# Altium PCB chipshouter-pico.PcbDoc (part 1 of 2)
Units mm, origin at the board's own origin, x right, y up, seen from the top; angles counter-clockwise.
Board outline 40 x 116 mm, 2 copper layers (Top Layer, Bottom Layer); 44 components, 36 nets, 230 pads, 5 vias.
Unrouted connection lines stored in the file: 2.
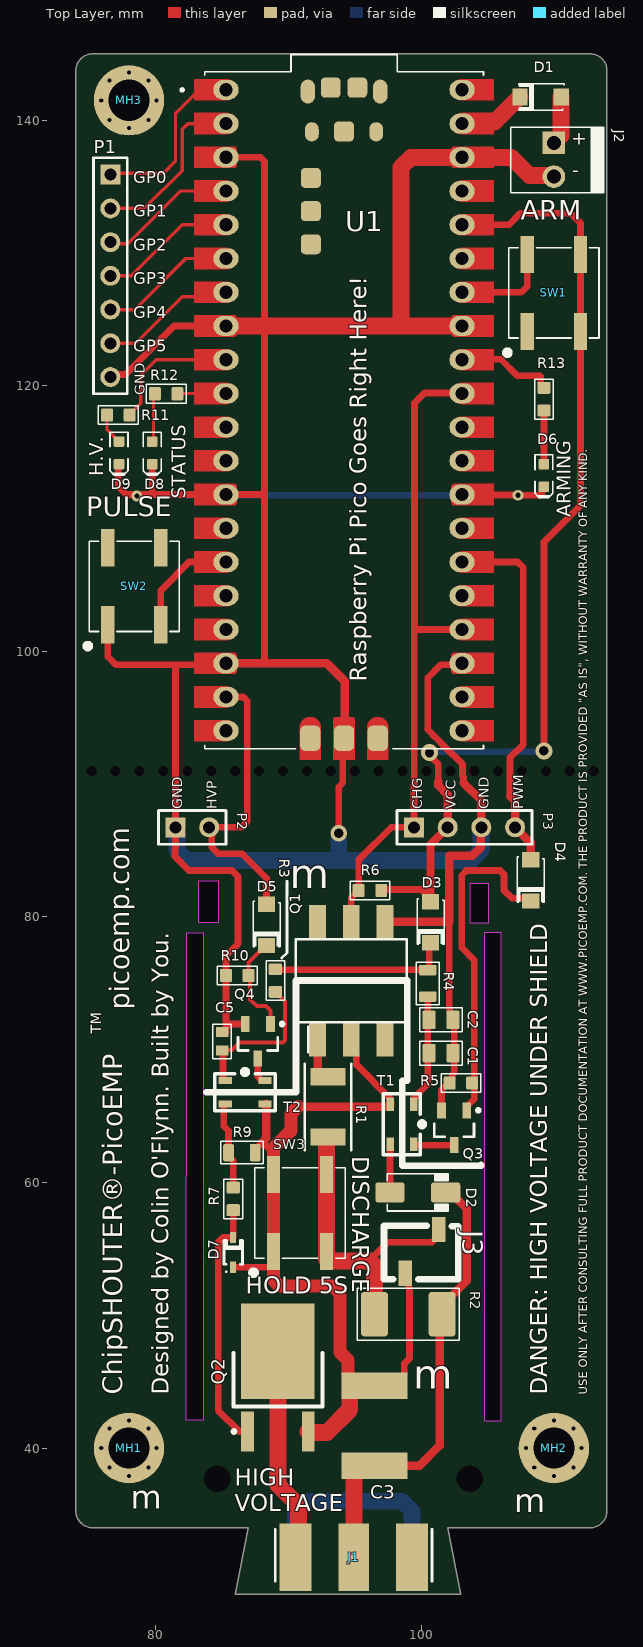
[diagram p0: Top Layer view]
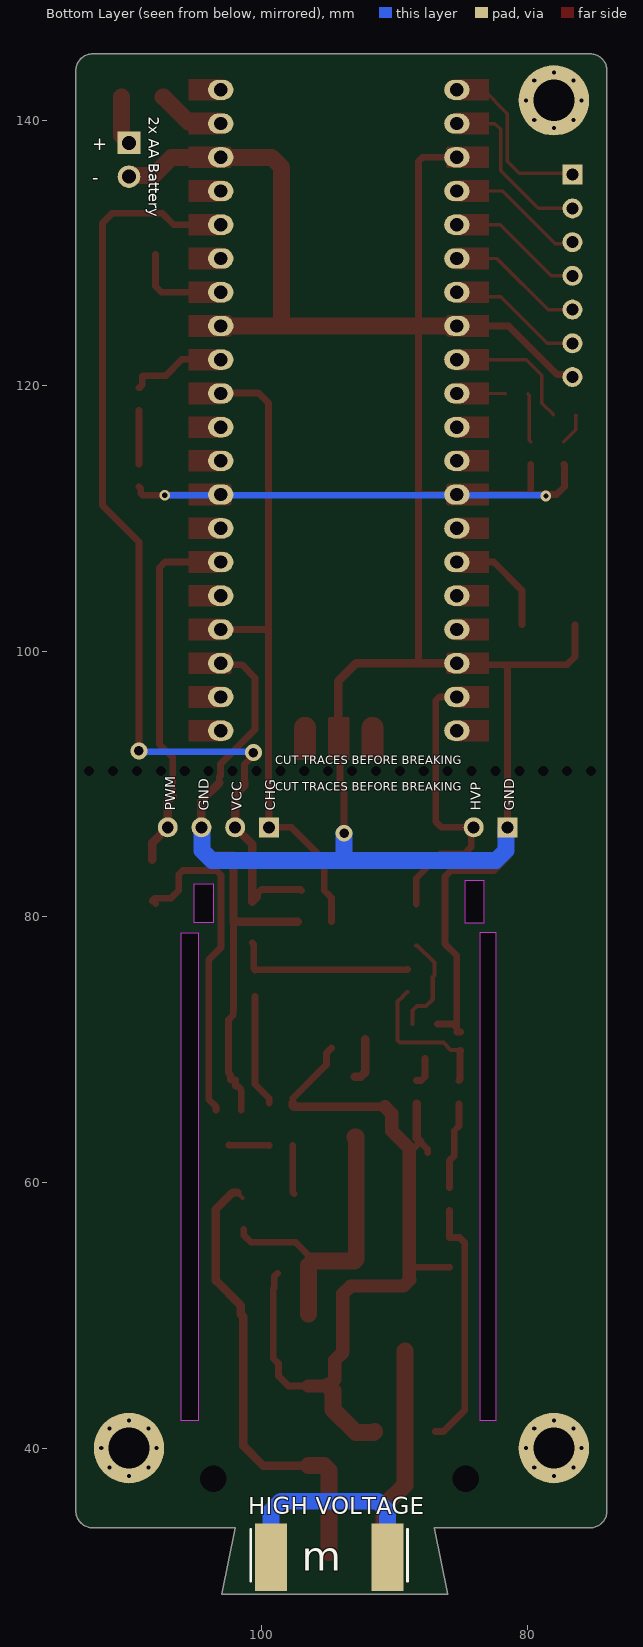
[diagram p1: Bottom Layer view, seen from below]
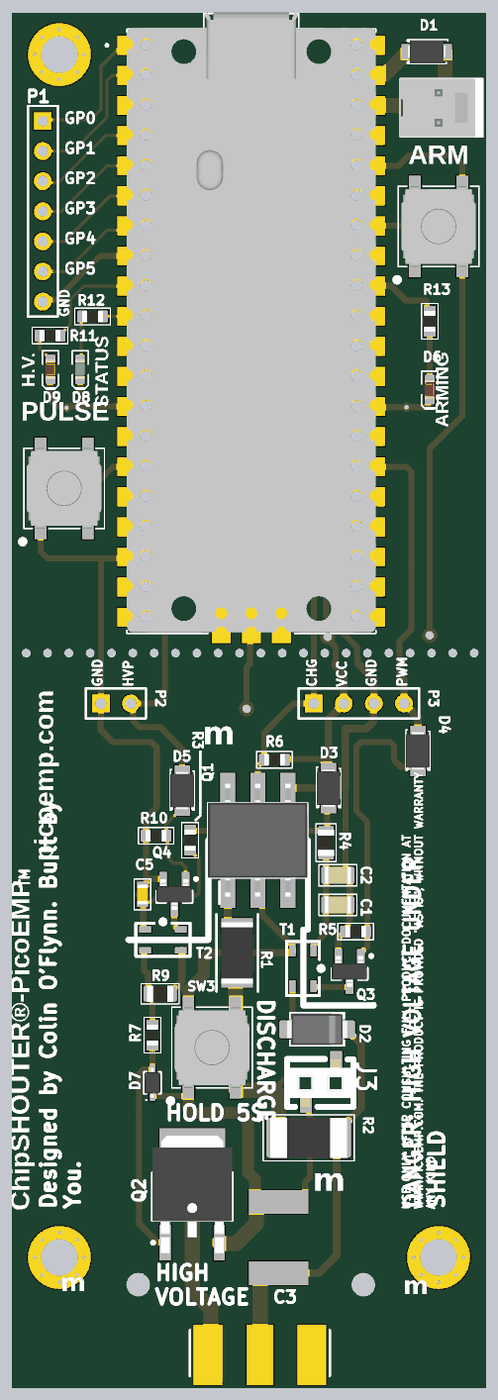
[diagram p3: 3D render of the assembled board from above, using the file's embedded part models]

## Layer stack, top to bottom
Top Solder: solder mask 0.0102, Solder Resist, Dk 3.5
Top Layer: signal copper 0.0356
Dielectric 1: dielectric 0.32, FR-4, Dk 4.8
Bottom Layer: signal copper 0.0356
Bottom Solder: solder mask 0.0102, Solder Resist, Dk 3.5

## Board outline
75.27,34 87,34 86,29 103,29 102,34 112.73,34 ccw(c112.73,35.27) 114,35.27 114,37 114,143.75 114,143.73 ccw(c112.73,143.73) 112.73,145 75.27,145 ccw(c75.27,143.73) 74,143.73 74,143.75 74,35.27 ccw(c75.27,35.27)
cut-out: 82.347,78.816 83.591,78.816 83.591,42.088 82.321,42.088
cut-out: 84.709,82.728 84.709,79.553 83.261,79.553 83.261,82.728
cut-out: 104.775,78.816 104.775,42.062 106.045,42.062 106.045,78.816
cut-out: 103.657,82.499 103.657,79.553 105.08,79.553 105.08,82.499

## Design rules (kind name [scope] priority, off if disabled: settings)
Clearance [All] p1: gap=0.254 ignorepadtopadclearanceinfootprint=FALSE except(0: Arc-Hole Track-Hole SMDPad-Hole THPad-Hole Via-Hole Fill-Hole Poly-Hole Region-Hole Text-Hole)
PolygonConnect [All] p1: connectstyle=Relief reliefconductorwidth=0.254 reliefentries=4 polygonreliefangle="90 Angle" airgapwidth=0.254
RoutingVias [All] p1: holewidth=0.711 width=1.27 viastyle="Through Hole" minholewidth=0.711 minwidth=1.27 maxholewidth=0.711 maxwidth=1.27
SolderMaskExpansion [All] p1: expansion=0.102 istentingtop=FALSE
Width [All] p1: maxlimit=5.08 minlimit=0.254 preferedwidth=0.254 minimp=50.000000 maximp=50.000000 favimp=50.000000
30 further rules are at their usual default settings.

## Classes and differential pairs
component class chipshouter-pico-mcu: D1 D6 D8 D9 J2 MH1 MH2 MH3 P1 P2 P3 R11 R12 R13 SW1 SW2 U1
component class chipshouter-pico-hv: C1 C2 C3 C5 D2 D3 D4 D5 D7 J1 J3 Q1 Q2 Q3 Q4 R1 R2 R3 R4 R5 R6 R7 R9 R10 SW3 T1 T2

## Components (designator, comment, footprint, x,y, rotation, side; value= is the part's Value field where it differs from the comment)
C1 "4.7uF/50V" CAPC0805_M 101.5,69.75 r0 top value=4.7uF
C2 "4.7uF/50V" CAPC0805_M 101.5,72.25 r0 top value=4.7uF
C3 "0.47uF,630V,X7T" CKG57N_2220 96.495,41.681 r0 top value="0.47uF, 630V, X7T"
C5 "100n" CAPC0603_M 85.014,70.637 r90 top
D1 "DSS13UTR" DSS13UTR 109,141.75 r0 top
D2 "MURA160T3G" DO-214AC 99.75,59.25 r0 top
D3 "DSS13UTR" DSS13UTR 100.711,79.603 r90 top
D4 "DSS13UTR" DSS13UTR 108.25,82.75 r90 top
D5 "DSS13UTR" DSS13UTR 88.367,79.4 r90 top
D6 "LED, 0603, Red" LED-0603-RED 109.25,113.25 r270 top
D7 "MM3Z18VB" SOD323 85.852,54.737 r90 top
D8 "LED, 0603, Green" LED-0603-GREEN 79.75,114.95 r270 top
D9 "LED, 0603, Red" LED-0603-RED 77.25,114.95 r270 top
J1 "EDGE-SMA" CON-SMA-MALE-PCB-EDGE062 94.92,31.775 r270 top
J2 "1x2_Pin_Header" 22-23-2021 110,137.02 r270 top
J3 "BG306-02-A-2-0400-L-G" BG306-R2-2PIN 98.806,53.164 r0 top
MH1 "M3, Tight Fit" MOUNT_M3_TIGHT 78,40 r0 top
MH2 "M3, Tight Fit" MOUNT_M3_TIGHT 110,40 r0 top
MH3 "M3, Tight Fit" MOUNT_M3_TIGHT 78,141.5 r0 top
P1 "Header 7" HDR1X7 76.6,135.9 r270 top
P2 "Header 2" HDR1X2 81.5,86.75 r0 top
P3 "Header 4" HDR1X4 99.46,86.75 r0 top
Q1 "LDA111STR" SOP254P952X470-6N 94.742,75.204 r90 top
Q2 "RGT16BM65DTL" DPAK_TO-252AA_M 89.211,45.35 r90 top
Q3 "AO3422" SOT95P245X110-3M 102.489,64.135 r270 top
Q4 "AO3422" SOT95P245X110-3M 87.706,70.637 r270 top
R1 "20M" RESC5025X06N 93,65.7 r270 top
R2 "300K" RESC6432X06N 99.035,50.089 r0 top
R3 "10R" RESC1608X55N 89.027,75.209 r270 top
R4 "75R" RESC2012X70N 100.5,75 r270 top
R5 "1k" RESC1608X55N 103,67.5 r180 top
R6 "22k" RESC1608X55N 96.15,82 r180 top
R7 "10R" RESC1608X55N 85.852,58.764 r270 top
R9 "2k" RESC2012X70N 86.5,62.25 r0 top value=75R
R10 "1k" RESC1608X55N 86.157,75.59 r180 top
R11 "1k" RESC1608X55N 77.2,117.8 r0 top
R12 "1k" RESC1608X55N 80.8,119.4 r0 top
R13 "1k" RESC1608X55N 109.25,119 r90 top
SW1 "KSC741J LFS" CK_KSC7J 110,127 r90 top
SW2 "KSC741J LFS" CK_KSC7J 78.4,104.9 r90 top
SW3 "KSC741J LFS" CK_KSC7J 90.881,57.709 r90 top
T1 "ATB322524" ATB322524 98.552,64.389 r90 top
T2 "ATB322524" ATB322524 86.741,66.802 r180 top
U1 "SC0915" MODULE_SC0915_TH 94.196,118.157 r0 top

## Footprints (in the part's own frame and the unit in brackets; to place one, negate y for a bottom-side part, rotate by r counter-clockwise, add the part's x,y. Pads: shape width x height; smd on the part's side, far side on the other; paste and mask are expansions set on the pad)
22-23-2021 [mm]
  rect 1.7x1.7 hole 1.05: 1(-1.27,0)
  round 1.7 hole 1.05: 2(1.27,0)
  silkscreen extent -2.46,-3.25 2.46,3.75, body extent -2.46,-3.25 2.46,3.1, height 9.08
ATB322524 [mm]
  rect 1x0.55 smd: 1(-1.5,-0.885) 2(-1.5,0.885) 3(1.5,0.885) 4(1.5,-0.885)
  silkscreen extent -2.29,-1.7 2.29,1.4, body extent -1.6,-1.25 1.6,1.25, height 2.4
BG306-R2-2PIN [mm]
  rect 1.02x1.9 smd: 1(0,0) 2(2.54,3.3)
  silkscreen extent -1.6,-0.45 4,3.57, body extent -1.58,-0.45 4,3.55, height 5.11
CAPC0603_M [mm]
  rect 0.75x0.95 smd: 1(-0.7,0) 2(0.7,0)
  silkscreen extent -1.3,-0.7 1.3,0.7, body extent -0.85,-0.45 0.85,0.45, height 0.9
CAPC0805_M [mm] "Chip Capacitor, Body 2.0x1.2mm, EIA 0805, IPC Medium Density"
  round 0.254 on Mech15: 0(0,0)
  rrect25% 1x1.4 smd: 1(-0.9,0) 2(0.9,0)
  Top Layer pour cut-out: -0.675,0.7 0.675,0.7 0.675,-0.7 -0.675,-0.7
  silkscreen extent -1.6,-0.9 1.6,0.9, body extent -1.1,-0.72 1.1,0.73, height 1.34
CK_KSC7J [mm] "Switch, Tactile; 4 pin, 6.80 mm L X 6.80 mm W X 4.3mm"
  rect 2.8x1 smd: 1(-2.9,2) 2(-2.9,-2) 3(2.9,-2) 4(2.9,2)
  silkscreen extent -4.7,-3.4 3.4,3.7, body extent -3.4,-3.15 3.4,3.15, height 4.29
CKG57N_2220 [mm] "Stack ceramic, 2220"
  rect 5x2 smd: 1(0,-3) 2(0,3)
  body extent -2.5,-3 2.5,3, height 5
CON-SMA-MALE-PCB-EDGE062 [mm]
  rect 5.08x2.29 smd paste-10: 1(0,0)
  rect 5.08x2.415 smd paste-10: 2(0,-4.383) 5(0,4.383)
  rect 5.08x2.415 smd far side paste-10: 3(0,-4.383) 4(0,4.383)
  silkscreen extent -2.1,-5.9 1.8,5.9
DO-214AC [mm] "JEDEC DO214 variation AC. SMA"
  round 0.508 on Mech15: 0(0,0)
  rrect25% 2.2x1.5 smd: A(-2.1,0) K(2.1,0)
  silkscreen extent -2.3,-1.4 2.3,1.4, body extent -2.6,-1.3 2.6,1.3, height 2.42
DPAK_TO-252AA_M [mm] "D-PAK, 3-Pads, Body 6.21x6.72mm (max), IPC Medium Density (TO-252AA)"
  rect 3x0.95 smd: 1(-4.1,2.28) 2(-4.1,-2.28)
  rect 7.2x5.55 smd: 3(1.95,0)
  silkscreen extent -4.22,-3.35 1.8,3.43, body extent -4.98,-3.35 4.92,3.35, height 2.51
DSS13UTR [mm] "Molded Diode, 2-Leads, Body 2.62x1.80mm, IPC Medium Density"
  rect 1.15x1.3 smd: A(1.55,0) K(-1.55,0)
  silkscreen extent -1.65,-1.02 1.78,1.02, body extent -1.63,-1 1.63,1, height 1.1
HDR1X2 [mm] "Connector; Header; 2 Position"
  rect 1.5x1.5 hole 0.9: 1(0,0)
  round 1.5 hole 0.9: 2(2.54,0)
  silkscreen extent -1.27,-1.27 3.81,1.27
HDR1X4 [mm] "Connector; Header; 4 Position"
  rect 1.5x1.5 hole 0.9: 1(0,0)
  round 1.5 hole 0.9: 2(2.54,0) 3(5.08,0) 4(7.62,0)
  silkscreen extent -1.27,-1.27 8.89,1.27
HDR1X7 [mm] "Connector; Header; 7 Position"
  rect 1.5x1.5 hole 0.9: 1(0,0)
  round 1.5 hole 0.9: 2(2.54,0) 3(5.08,0) 4(7.62,0) 5(10.16,0) 6(12.7,0) 7(15.24,0)
  silkscreen extent -1.27,-1.27 16.51,1.27
LED-0603-GREEN [mm]
  round 0.254 on Mech15: 0(0,0)
  rrect25% 0.8x0.8 smd: A(-0.85,0) K(0.85,0)
  Top Layer pour cut-out: -0.5,0.5 0.5,0.5 0.5,-0.5 -0.5,-0.5
  silkscreen extent -1.55,-0.67 1.68,0.67, body extent -0.8,-0.4 0.8,0.4, height 0.75
LED-0603-RED [mm]
  round 0.254 on Mech15: 0(0,0)
  rrect25% 0.8x0.8 smd: A(-0.85,0) K(0.85,0)
  Top Layer pour cut-out: -0.5,0.5 0.5,0.5 0.5,-0.5 -0.5,-0.5
  silkscreen extent -1.55,-0.67 1.68,0.67, body extent -0.8,-0.4 0.8,0.4, height 0.75
MODULE_SC0915_TH [mm]
  oval 1.905x1.524 hole 1 paste-10: 1(-8.89,24.13) 2(-8.89,21.59) 3(-8.89,19.05) 4(-8.89,16.51) 5(-8.89,13.97) 6(-8.89,11.43) 7(-8.89,8.89) 8(-8.89,6.35) 9(-8.89,3.81) 10(-8.89,1.27) 11(-8.89,-1.27) 12(-8.89,-3.81) 13(-8.89,-6.35) 14(-8.89,-8.89) 15(-8.89,-11.43) 16(-8.89,-13.97) 17(-8.89,-16.51) 18(-8.89,-19.05) 19(-8.89,-21.59) 20(-8.89,-24.13) 21(8.89,-24.13) 22(8.89,-21.59) 23(8.89,-19.05) 24(8.89,-16.51) 25(8.89,-13.97) 26(8.89,-11.43) 27(8.89,-8.89) 28(8.89,-6.35) 29(8.89,-3.81) 30(8.89,-1.27) 31(8.89,1.27) 32(8.89,3.81) 33(8.89,6.35) 34(8.89,8.89) 35(8.89,11.43) 36(8.89,13.97) 37(8.89,16.51) 38(8.89,19.05) 39(8.89,21.59) 40(8.89,24.13)
  oval 1.1x1.8 smd paste-10: A(-2.725,24) B(2.725,24)
  oval 1.05x1.45 smd paste-10: C(-2.425,20.97) D(2.425,20.97)
  rrect50% 1.524x1.905 smd paste-10 mask+0.102: D1(-2.54,-24.7) D2(0,-24.7) D3(2.54,-24.7)
  rrect40% 1.5x1.5 smd paste-10: TP1(0,21) TP2(1,24.3) TP3(-1,24.3) TP4(-2.5,17.5) TP5(-2.5,15) TP6(-2.5,12.5)
  Top Layer region: -8.848,24.929 -8.806,24.926 -8.765,24.92 -8.724,24.913 -8.683,24.903 -8.643,24.891 -8.603,24.877 -8.565,24.861 -8.527,24.843 -8.49,24.823 -8.454,24.801 -8.42,24.777 -8.387,24.752 -8.355,24.725 -8.324,24.696 -8.295,24.665 -8.268,24.633 -8.243,24.6 -8.219,24.566 -8.197,24.53 -8.177,24.493 -8.159,24.455 -8.143,24.417 -8.129,24.377 -8.117,24.337 -8.107,24.296 -8.1,24.255 -8.094,24.214 -8.091,24.172 -8.09,24.13 -8.091,24.088 -8.094,24.046 -8.1,24.005 -8.107,23.964 -8.117,23.923 -8.129,23.883 -8.143,23.843 -8.159,23.805 -8.177,23.767 -8.197,23.73 -8.219,23.694 -8.243,23.66 -8.268,23.627 -8.295,23.595 -8.324,23.564 -8.355,23.535 -8.387,23.508 -8.42,23.483 -8.454,23.459 -8.49,23.437 -8.527,23.417 -8.565,23.399 -8.603,23.383 -8.643,23.369 -8.683,23.357 -8.724,23.347 -8.765,23.34 -8.806,23.334 -8.848,23.331 -8.89,23.33 -11.29,23.33 -11.29,24.93 -8.89,24.93
  Top Layer region: -8.848,22.389 -8.806,22.386 -8.765,22.38 -8.724,22.373 -8.683,22.363 -8.643,22.351 -8.603,22.337 -8.565,22.321 -8.527,22.303 -8.49,22.283 -8.454,22.261 -8.42,22.237 -8.387,22.212 -8.355,22.185 -8.324,22.156 -8.295,22.125 -8.268,22.093 -8.243,22.06 -8.219,22.026 -8.197,21.99 -8.177,21.953 -8.159,21.915 -8.143,21.877 -8.129,21.837 -8.117,21.797 -8.107,21.756 -8.1,21.715 -8.094,21.674 -8.091,21.632 -8.09,21.59 -8.091,21.548 -8.094,21.506 -8.1,21.465 -8.107,21.424 -8.117,21.383 -8.129,21.343 -8.143,21.303 -8.159,21.265 -8.177,21.227 -8.197,21.19 -8.219,21.154 -8.243,21.12 -8.268,21.087 -8.295,21.055 -8.324,21.024 -8.355,20.995 -8.387,20.968 -8.42,20.943 -8.454,20.919 -8.49,20.897 -8.527,20.877 -8.565,20.859 -8.603,20.843 -8.643,20.829 -8.683,20.817 -8.724,20.807 -8.765,20.8 -8.806,20.794 -8.848,20.791 -8.89,20.79 -11.29,20.79 -11.29,22.39 -8.89,22.39
  Top Layer region: -8.848,17.309 -8.806,17.306 -8.765,17.3 -8.724,17.293 -8.683,17.283 -8.643,17.271 -8.603,17.257 -8.565,17.241 -8.527,17.223 -8.49,17.203 -8.454,17.181 -8.42,17.157 -8.387,17.132 -8.355,17.105 -8.324,17.076 -8.295,17.045 -8.268,17.013 -8.243,16.98 -8.219,16.946 -8.197,16.91 -8.177,16.873 -8.159,16.835 -8.143,16.797 -8.129,16.757 -8.117,16.717 -8.107,16.676 -8.1,16.635 -8.094,16.594 -8.091,16.552 -8.09,16.51 -8.091,16.468 -8.094,16.426 -8.1,16.385 -8.107,16.344 -8.117,16.303 -8.129,16.263 -8.143,16.223 -8.159,16.185 -8.177,16.147 -8.197,16.11 -8.219,16.074 -8.243,16.04 -8.268,16.007 -8.295,15.975 -8.324,15.944 -8.355,15.915 -8.387,15.888 -8.42,15.863 -8.454,15.839 -8.49,15.817 -8.527,15.797 -8.565,15.779 -8.603,15.763 -8.643,15.749 -8.683,15.737 -8.724,15.727 -8.765,15.72 -8.806,15.714 -8.848,15.711 -8.89,15.71 -11.29,15.71 -11.29,17.31 -8.89,17.31
  Top Layer region: -8.848,14.769 -8.806,14.766 -8.765,14.76 -8.724,14.753 -8.683,14.743 -8.643,14.731 -8.603,14.717 -8.565,14.701 -8.527,14.683 -8.49,14.663 -8.454,14.641 -8.42,14.617 -8.387,14.592 -8.355,14.565 -8.324,14.536 -8.295,14.505 -8.268,14.473 -8.243,14.44 -8.219,14.406 -8.197,14.37 -8.177,14.333 -8.159,14.295 -8.143,14.257 -8.129,14.217 -8.117,14.177 -8.107,14.136 -8.1,14.095 -8.094,14.054 -8.091,14.012 -8.09,13.97 -8.091,13.928 -8.094,13.886 -8.1,13.845 -8.107,13.804 -8.117,13.763 -8.129,13.723 -8.143,13.683 -8.159,13.645 -8.177,13.607 -8.197,13.57 -8.219,13.534 -8.243,13.5 -8.268,13.467 -8.295,13.435 -8.324,13.404 -8.355,13.375 -8.387,13.348 -8.42,13.323 -8.454,13.299 -8.49,13.277 -8.527,13.257 -8.565,13.239 -8.603,13.223 -8.643,13.209 -8.683,13.197 -8.724,13.187 -8.765,13.18 -8.806,13.174 -8.848,13.171 -8.89,13.17 -11.29,13.17 -11.29,14.77 -8.89,14.77
  Top Layer region: -8.848,12.229 -8.806,12.226 -8.765,12.22 -8.724,12.213 -8.683,12.203 -8.643,12.191 -8.603,12.177 -8.565,12.161 -8.527,12.143 -8.49,12.123 -8.454,12.101 -8.42,12.077 -8.387,12.052 -8.355,12.025 -8.324,11.996 -8.295,11.965 -8.268,11.933 -8.243,11.9 -8.219,11.866 -8.197,11.83 -8.177,11.793 -8.159,11.755 -8.143,11.717 -8.129,11.677 -8.117,11.637 -8.107,11.596 -8.1,11.555 -8.094,11.514 -8.091,11.472 -8.09,11.43 -8.091,11.388 -8.094,11.346 -8.1,11.305 -8.107,11.264 -8.117,11.223 -8.129,11.183 -8.143,11.143 -8.159,11.105 -8.177,11.067 -8.197,11.03 -8.219,10.994 -8.243,10.96 -8.268,10.927 -8.295,10.895 -8.324,10.864 -8.355,10.835 -8.387,10.808 -8.42,10.783 -8.454,10.759 -8.49,10.737 -8.527,10.717 -8.565,10.699 -8.603,10.683 -8.643,10.669 -8.683,10.657 -8.724,10.647 -8.765,10.64 -8.806,10.634 -8.848,10.631 -8.89,10.63 -11.29,10.63 -11.29,12.23 -8.89,12.23
  Top Layer region: -8.848,9.689 -8.806,9.686 -8.765,9.68 -8.724,9.673 -8.683,9.663 -8.643,9.651 -8.603,9.637 -8.565,9.621 -8.527,9.603 -8.49,9.583 -8.454,9.561 -8.42,9.537 -8.387,9.512 -8.355,9.485 -8.324,9.456 -8.295,9.425 -8.268,9.393 -8.243,9.36 -8.219,9.326 -8.197,9.29 -8.177,9.253 -8.159,9.215 -8.143,9.177 -8.129,9.137 -8.117,9.097 -8.107,9.056 -8.1,9.015 -8.094,8.974 -8.091,8.932 -8.09,8.89 -8.091,8.848 -8.094,8.806 -8.1,8.765 -8.107,8.724 -8.117,8.683 -8.129,8.643 -8.143,8.603 -8.159,8.565 -8.177,8.527 -8.197,8.49 -8.219,8.454 -8.243,8.42 -8.268,8.387 -8.295,8.355 -8.324,8.324 -8.355,8.295 -8.387,8.268 -8.42,8.243 -8.454,8.219 -8.49,8.197 -8.527,8.177 -8.565,8.159 -8.603,8.143 -8.643,8.129 -8.683,8.117 -8.724,8.107 -8.765,8.1 -8.806,8.094 -8.848,8.091 -8.89,8.09 -11.29,8.09 -11.29,9.69 -8.89,9.69
  Top Layer region: -8.848,4.609 -8.806,4.606 -8.765,4.6 -8.724,4.593 -8.683,4.583 -8.643,4.571 -8.603,4.557 -8.565,4.541 -8.527,4.523 -8.49,4.503 -8.454,4.481 -8.42,4.457 -8.387,4.432 -8.355,4.405 -8.324,4.376 -8.295,4.345 -8.268,4.313 -8.243,4.28 -8.219,4.246 -8.197,4.21 -8.177,4.173 -8.159,4.135 -8.143,4.097 -8.129,4.057 -8.117,4.017 -8.107,3.976 -8.1,3.935 -8.094,3.894 -8.091,3.852 -8.09,3.81 -8.091,3.768 -8.094,3.726 -8.1,3.685 -8.107,3.644 -8.117,3.603 -8.129,3.563 -8.143,3.523 -8.159,3.485 -8.177,3.447 -8.197,3.41 -8.219,3.374 -8.243,3.34 -8.268,3.307 -8.295,3.275 -8.324,3.244 -8.355,3.215 -8.387,3.188 -8.42,3.163 -8.454,3.139 -8.49,3.117 -8.527,3.097 -8.565,3.079 -8.603,3.063 -8.643,3.049 -8.683,3.037 -8.724,3.027 -8.765,3.02 -8.806,3.014 -8.848,3.011 -8.89,3.01 -11.29,3.01 -11.29,4.61 -8.89,4.61
  Top Layer region: -8.848,2.069 -8.806,2.066 -8.765,2.06 -8.724,2.053 -8.683,2.043 -8.643,2.031 -8.603,2.017 -8.565,2.001 -8.527,1.983 -8.49,1.963 -8.454,1.941 -8.42,1.917 -8.387,1.892 -8.355,1.865 -8.324,1.836 -8.295,1.805 -8.268,1.773 -8.243,1.74 -8.219,1.706 -8.197,1.67 -8.177,1.633 -8.159,1.595 -8.143,1.557 -8.129,1.517 -8.117,1.477 -8.107,1.436 -8.1,1.395 -8.094,1.354 -8.091,1.312 -8.09,1.27 -8.091,1.228 -8.094,1.186 -8.1,1.145 -8.107,1.104 -8.117,1.063 -8.129,1.023 -8.143,0.983 -8.159,0.945 -8.177,0.907 -8.197,0.87 -8.219,0.834 -8.243,0.8 -8.268,0.767 -8.295,0.735 -8.324,0.704 -8.355,0.675 -8.387,0.648 -8.42,0.623 -8.454,0.599 -8.49,0.577 -8.527,0.557 -8.565,0.539 -8.603,0.523 -8.643,0.509 -8.683,0.497 -8.724,0.487 -8.765,0.48 -8.806,0.474 -8.848,0.471 -8.89,0.47 -11.29,0.47 -11.29,2.07 -8.89,2.07
  Top Layer region: -8.848,-0.471 -8.806,-0.474 -8.765,-0.48 -8.724,-0.487 -8.683,-0.497 -8.643,-0.509 -8.603,-0.523 -8.565,-0.539 -8.527,-0.557 -8.49,-0.577 -8.454,-0.599 -8.42,-0.623 -8.387,-0.648 -8.355,-0.675 -8.324,-0.704 -8.295,-0.735 -8.268,-0.767 -8.243,-0.8 -8.219,-0.834 -8.197,-0.87 -8.177,-0.907 -8.159,-0.945 -8.143,-0.983 -8.129,-1.023 -8.117,-1.063 -8.107,-1.104 -8.1,-1.145 -8.094,-1.186 -8.091,-1.228 -8.09,-1.27 -8.091,-1.312 -8.094,-1.354 -8.1,-1.395 -8.107,-1.436 -8.117,-1.477 -8.129,-1.517 -8.143,-1.557 -8.159,-1.595 -8.177,-1.633 -8.197,-1.67 -8.219,-1.706 -8.243,-1.74 -8.268,-1.773 -8.295,-1.805 -8.324,-1.836 -8.355,-1.865 -8.387,-1.892 -8.42,-1.917 -8.454,-1.941 -8.49,-1.963 -8.527,-1.983 -8.565,-2.001 -8.603,-2.017 -8.643,-2.031 -8.683,-2.043 -8.724,-2.053 -8.765,-2.06 -8.806,-2.066 -8.848,-2.069 -8.89,-2.07 -11.29,-2.07 -11.29,-0.47 -8.89,-0.47
  Top Layer region: -8.848,-3.011 -8.806,-3.014 -8.765,-3.02 -8.724,-3.027 -8.683,-3.037 -8.643,-3.049 -8.603,-3.063 -8.565,-3.079 -8.527,-3.097 -8.49,-3.117 -8.454,-3.139 -8.42,-3.163 -8.387,-3.188 -8.355,-3.215 -8.324,-3.244 -8.295,-3.275 -8.268,-3.307 -8.243,-3.34 -8.219,-3.374 -8.197,-3.41 -8.177,-3.447 -8.159,-3.485 -8.143,-3.523 -8.129,-3.563 -8.117,-3.603 -8.107,-3.644 -8.1,-3.685 -8.094,-3.726 -8.091,-3.768 -8.09,-3.81 -8.091,-3.852 -8.094,-3.894 -8.1,-3.935 -8.107,-3.976 -8.117,-4.017 -8.129,-4.057 -8.143,-4.097 -8.159,-4.135 -8.177,-4.173 -8.197,-4.21 -8.219,-4.246 -8.243,-4.28 -8.268,-4.313 -8.295,-4.345 -8.324,-4.376 -8.355,-4.405 -8.387,-4.432 -8.42,-4.457 -8.454,-4.481 -8.49,-4.503 -8.527,-4.523 -8.565,-4.541 -8.603,-4.557 -8.643,-4.571 -8.683,-4.583 -8.724,-4.593 -8.765,-4.6 -8.806,-4.606 -8.848,-4.609 -8.89,-4.61 -11.29,-4.61 -11.29,-3.01 -8.89,-3.01
  Top Layer region: -8.848,-8.091 -8.806,-8.094 -8.765,-8.1 -8.724,-8.107 -8.683,-8.117 -8.643,-8.129 -8.603,-8.143 -8.565,-8.159 -8.527,-8.177 -8.49,-8.197 -8.454,-8.219 -8.42,-8.243 -8.387,-8.268 -8.355,-8.295 -8.324,-8.324 -8.295,-8.355 -8.268,-8.387 -8.243,-8.42 -8.219,-8.454 -8.197,-8.49 -8.177,-8.527 -8.159,-8.565 -8.143,-8.603 -8.129,-8.643 -8.117,-8.683 -8.107,-8.724 -8.1,-8.765 -8.094,-8.806 -8.091,-8.848 -8.09,-8.89 -8.091,-8.932 -8.094,-8.974 -8.1,-9.015 -8.107,-9.056 -8.117,-9.097 -8.129,-9.137 -8.143,-9.177 -8.159,-9.215 -8.177,-9.253 -8.197,-9.29 -8.219,-9.326 -8.243,-9.36 -8.268,-9.393 -8.295,-9.425 -8.324,-9.456 -8.355,-9.485 -8.387,-9.512 -8.42,-9.537 -8.454,-9.561 -8.49,-9.583 -8.527,-9.603 -8.565,-9.621 -8.603,-9.637 -8.643,-9.651 -8.683,-9.663 -8.724,-9.673 -8.765,-9.68 -8.806,-9.686 -8.848,-9.689 -8.89,-9.69 -11.29,-9.69 -11.29,-8.09 -8.89,-8.09
  Top Layer region: -8.848,-10.631 -8.806,-10.634 -8.765,-10.64 -8.724,-10.647 -8.683,-10.657 -8.643,-10.669 -8.603,-10.683 -8.565,-10.699 -8.527,-10.717 -8.49,-10.737 -8.454,-10.759 -8.42,-10.783 -8.387,-10.808 -8.355,-10.835 -8.324,-10.864 -8.295,-10.895 -8.268,-10.927 -8.243,-10.96 -8.219,-10.994 -8.197,-11.03 -8.177,-11.067 -8.159,-11.105 -8.143,-11.143 -8.129,-11.183 -8.117,-11.223 -8.107,-11.264 -8.1,-11.305 -8.094,-11.346 -8.091,-11.388 -8.09,-11.43 -8.091,-11.472 -8.094,-11.514 -8.1,-11.555 -8.107,-11.596 -8.117,-11.637 -8.129,-11.677 -8.143,-11.717 -8.159,-11.755 -8.177,-11.793 -8.197,-11.83 -8.219,-11.866 -8.243,-11.9 -8.268,-11.933 -8.295,-11.965 -8.324,-11.996 -8.355,-12.025 -8.387,-12.052 -8.42,-12.077 -8.454,-12.101 -8.49,-12.123 -8.527,-12.143 -8.565,-12.161 -8.603,-12.177 -8.643,-12.191 -8.683,-12.203 -8.724,-12.213 -8.765,-12.22 -8.806,-12.226 -8.848,-12.229 -8.89,-12.23 -11.29,-12.23 -11.29,-10.63 -8.89,-10.63
  Top Layer region: -8.848,-13.171 -8.806,-13.174 -8.765,-13.18 -8.724,-13.187 -8.683,-13.197 -8.643,-13.209 -8.603,-13.223 -8.565,-13.239 -8.527,-13.257 -8.49,-13.277 -8.454,-13.299 -8.42,-13.323 -8.387,-13.348 -8.355,-13.375 -8.324,-13.404 -8.295,-13.435 -8.268,-13.467 -8.243,-13.5 -8.219,-13.534 -8.197,-13.57 -8.177,-13.607 -8.159,-13.645 -8.143,-13.683 -8.129,-13.723 -8.117,-13.763 -8.107,-13.804 -8.1,-13.845 -8.094,-13.886 -8.091,-13.928 -8.09,-13.97 -8.091,-14.012 -8.094,-14.054 -8.1,-14.095 -8.107,-14.136 -8.117,-14.177 -8.129,-14.217 -8.143,-14.257 -8.159,-14.295 -8.177,-14.333 -8.197,-14.37 -8.219,-14.406 -8.243,-14.44 -8.268,-14.473 -8.295,-14.505 -8.324,-14.536 -8.355,-14.565 -8.387,-14.592 -8.42,-14.617 -8.454,-14.641 -8.49,-14.663 -8.527,-14.683 -8.565,-14.701 -8.603,-14.717 -8.643,-14.731 -8.683,-14.743 -8.724,-14.753 -8.765,-14.76 -8.806,-14.766 -8.848,-14.769 -8.89,-14.77 -11.29,-14.77 -11.29,-13.17 -8.89,-13.17
  Top Layer region: -8.848,-15.711 -8.806,-15.714 -8.765,-15.72 -8.724,-15.727 -8.683,-15.737 -8.643,-15.749 -8.603,-15.763 -8.565,-15.779 -8.527,-15.797 -8.49,-15.817 -8.454,-15.839 -8.42,-15.863 -8.387,-15.888 -8.355,-15.915 -8.324,-15.944 -8.295,-15.975 -8.268,-16.007 -8.243,-16.04 -8.219,-16.074 -8.197,-16.11 -8.177,-16.147 -8.159,-16.185 -8.143,-16.223 -8.129,-16.263 -8.117,-16.303 -8.107,-16.344 -8.1,-16.385 -8.094,-16.426 -8.091,-16.468 -8.09,-16.51 -8.091,-16.552 -8.094,-16.594 -8.1,-16.635 -8.107,-16.676 -8.117,-16.717 -8.129,-16.757 -8.143,-16.797 -8.159,-16.835 -8.177,-16.873 -8.197,-16.91 -8.219,-16.946 -8.243,-16.98 -8.268,-17.013 -8.295,-17.045 -8.324,-17.076 -8.355,-17.105 -8.387,-17.132 -8.42,-17.157 -8.454,-17.181 -8.49,-17.203 -8.527,-17.223 -8.565,-17.241 -8.603,-17.257 -8.643,-17.271 -8.683,-17.283 -8.724,-17.293 -8.765,-17.3 -8.806,-17.306 -8.848,-17.309 -8.89,-17.31 -11.29,-17.31 -11.29,-15.71 -8.89,-15.71
  Top Layer region: -8.848,-20.791 -8.806,-20.794 -8.765,-20.8 -8.724,-20.807 -8.683,-20.817 -8.643,-20.829 -8.603,-20.843 -8.565,-20.859 -8.527,-20.877 -8.49,-20.897 -8.454,-20.919 -8.42,-20.943 -8.387,-20.968 -8.355,-20.995 -8.324,-21.024 -8.295,-21.055 -8.268,-21.087 -8.243,-21.12 -8.219,-21.154 -8.197,-21.19 -8.177,-21.227 -8.159,-21.265 -8.143,-21.303 -8.129,-21.343 -8.117,-21.383 -8.107,-21.424 -8.1,-21.465 -8.094,-21.506 -8.091,-21.548 -8.09,-21.59 -8.091,-21.632 -8.094,-21.674 -8.1,-21.715 -8.107,-21.756 -8.117,-21.797 -8.129,-21.837 -8.143,-21.877 -8.159,-21.915 -8.177,-21.953 -8.197,-21.99 -8.219,-22.026 -8.243,-22.06 -8.268,-22.093 -8.295,-22.125 -8.324,-22.156 -8.355,-22.185 -8.387,-22.212 -8.42,-22.237 -8.454,-22.261 -8.49,-22.283 -8.527,-22.303 -8.565,-22.321 -8.603,-22.337 -8.643,-22.351 -8.683,-22.363 -8.724,-22.373 -8.765,-22.38 -8.806,-22.386 -8.848,-22.389 -8.89,-22.39 -11.29,-22.39 -11.29,-20.79 -8.89,-20.79
  Top Layer region: -8.848,-23.331 -8.806,-23.334 -8.765,-23.34 -8.724,-23.347 -8.683,-23.357 -8.643,-23.369 -8.603,-23.383 -8.565,-23.399 -8.527,-23.417 -8.49,-23.437 -8.454,-23.459 -8.42,-23.483 -8.387,-23.508 -8.355,-23.535 -8.324,-23.564 -8.295,-23.595 -8.268,-23.627 -8.243,-23.66 -8.219,-23.694 -8.197,-23.73 -8.177,-23.767 -8.159,-23.805 -8.143,-23.843 -8.129,-23.883 -8.117,-23.923 -8.107,-23.964 -8.1,-24.005 -8.094,-24.046 -8.091,-24.088 -8.09,-24.13 -8.091,-24.172 -8.094,-24.214 -8.1,-24.255 -8.107,-24.296 -8.117,-24.337 -8.129,-24.377 -8.143,-24.417 -8.159,-24.455 -8.177,-24.493 -8.197,-24.53 -8.219,-24.566 -8.243,-24.6 -8.268,-24.633 -8.295,-24.665 -8.324,-24.696 -8.355,-24.725 -8.387,-24.752 -8.42,-24.777 -8.454,-24.801 -8.49,-24.823 -8.527,-24.843 -8.565,-24.861 -8.603,-24.877 -8.643,-24.891 -8.683,-24.903 -8.724,-24.913 -8.765,-24.92 -8.806,-24.926 -8.848,-24.929 -8.89,-24.93 -11.29,-24.93 -11.29,-23.33 -8.89,-23.33
  Top Layer region: -8.28,19.85 -8.269,19.849 -8.259,19.848 -8.248,19.846 -8.238,19.843 -8.228,19.84 -8.218,19.837 -8.209,19.833 -8.199,19.828 -8.19,19.823 -8.181,19.818 -8.172,19.812 -8.164,19.805 -8.156,19.799 -8.149,19.791 -8.141,19.784 -8.135,19.776 -8.128,19.768 -8.122,19.759 -8.117,19.75 -8.112,19.741 -8.107,19.731 -8.103,19.722 -8.1,19.712 -8.097,19.702 -8.094,19.692 -8.092,19.681 -8.091,19.671 -8.09,19.66 -8.09,19.65 -8.09,18.45 -8.09,18.44 -8.091,18.429 -8.092,18.419 -8.094,18.408 -8.097,18.398 -8.1,18.388 -8.103,18.378 -8.107,18.369 -8.112,18.359 -8.117,18.35 -8.122,18.341 -8.128,18.332 -8.135,18.324 -8.141,18.316 -8.149,18.309 -8.156,18.301 -8.164,18.295 -8.172,18.288 -8.181,18.282 -8.19,18.277 -8.199,18.272 -8.209,18.267 -8.218,18.263 -8.228,18.26 -8.238,18.257 -8.248,18.254 -8.259,18.252 -8.269,18.251 -8.28,18.25 -8.29,18.25 -11.29,18.25 -11.29,19.85 -8.29,19.85
  Top Layer region: -8.28,7.15 -8.269,7.149 -8.259,7.148 -8.248,7.146 -8.238,7.143 -8.228,7.14 -8.218,7.137 -8.209,7.133 -8.199,7.128 -8.19,7.123 -8.181,7.118 -8.172,7.112 -8.164,7.105 -8.156,7.099 -8.149,7.091 -8.141,7.084 -8.135,7.076 -8.128,7.068 -8.122,7.059 -8.117,7.05 -8.112,7.041 -8.107,7.031 -8.103,7.022 -8.1,7.012 -8.097,7.002 -8.094,6.992 -8.092,6.981 -8.091,6.971 -8.09,6.96 -8.09,6.95 -8.09,5.75 -8.09,5.74 -8.091,5.729 -8.092,5.719 -8.094,5.708 -8.097,5.698 -8.1,5.688 -8.103,5.678 -8.107,5.669 -8.112,5.659 -8.117,5.65 -8.122,5.641 -8.128,5.632 -8.135,5.624 -8.141,5.616 -8.149,5.609 -8.156,5.601 -8.164,5.595 -8.172,5.588 -8.181,5.582 -8.19,5.577 -8.199,5.572 -8.209,5.567 -8.218,5.563 -8.228,5.56 -8.238,5.557 -8.248,5.554 -8.259,5.552 -8.269,5.551 -8.28,5.55 -8.29,5.55 -11.29,5.55 -11.29,7.15 -8.29,7.15
  Top Layer region: -8.28,-5.55 -8.269,-5.551 -8.259,-5.552 -8.248,-5.554 -8.238,-5.557 -8.228,-5.56 -8.218,-5.563 -8.209,-5.567 -8.199,-5.572 -8.19,-5.577 -8.181,-5.582 -8.172,-5.588 -8.164,-5.595 -8.156,-5.601 -8.149,-5.609 -8.141,-5.616 -8.135,-5.624 -8.128,-5.632 -8.122,-5.641 -8.117,-5.65 -8.112,-5.659 -8.107,-5.669 -8.103,-5.678 -8.1,-5.688 -8.097,-5.698 -8.094,-5.708 -8.092,-5.719 -8.091,-5.729 -8.09,-5.74 -8.09,-5.75 -8.09,-6.95 -8.09,-6.96 -8.091,-6.971 -8.092,-6.981 -8.094,-6.992 -8.097,-7.002 -8.1,-7.012 -8.103,-7.022 -8.107,-7.031 -8.112,-7.041 -8.117,-7.05 -8.122,-7.059 -8.128,-7.068 -8.135,-7.076 -8.141,-7.084 -8.149,-7.091 -8.156,-7.099 -8.164,-7.105 -8.172,-7.112 -8.181,-7.118 -8.19,-7.123 -8.199,-7.128 -8.209,-7.133 -8.218,-7.137 -8.228,-7.14 -8.238,-7.143 -8.248,-7.146 -8.259,-7.148 -8.269,-7.149 -8.28,-7.15 -8.29,-7.15 -11.29,-7.15 -11.29,-5.55 -8.29,-5.55
  Top Layer region: -8.28,-18.25 -8.269,-18.251 -8.259,-18.252 -8.248,-18.254 -8.238,-18.257 -8.228,-18.26 -8.218,-18.263 -8.209,-18.267 -8.199,-18.272 -8.19,-18.277 -8.181,-18.282 -8.172,-18.288 -8.164,-18.295 -8.156,-18.301 -8.149,-18.309 -8.141,-18.316 -8.135,-18.324 -8.128,-18.332 -8.122,-18.341 -8.117,-18.35 -8.112,-18.359 -8.107,-18.369 -8.103,-18.378 -8.1,-18.388 -8.097,-18.398 -8.094,-18.408 -8.092,-18.419 -8.091,-18.429 -8.09,-18.44 -8.09,-18.45 -8.09,-19.65 -8.09,-19.66 -8.091,-19.671 -8.092,-19.681 -8.094,-19.692 -8.097,-19.702 -8.1,-19.712 -8.103,-19.722 -8.107,-19.731 -8.112,-19.741 -8.117,-19.75 -8.122,-19.759 -8.128,-19.768 -8.135,-19.776 -8.141,-19.784 -8.149,-19.791 -8.156,-19.799 -8.164,-19.805 -8.172,-19.812 -8.181,-19.818 -8.19,-19.823 -8.199,-19.828 -8.209,-19.833 -8.218,-19.837 -8.228,-19.84 -8.238,-19.843 -8.248,-19.846 -8.259,-19.848 -8.269,-19.849 -8.28,-19.85 -8.29,-19.85 -11.29,-19.85 -11.29,-18.25 -8.29,-18.25
  Top Layer region: 11.29,23.33 8.89,23.33 8.848,23.331 8.806,23.334 8.765,23.34 8.724,23.347 8.683,23.357 8.643,23.369 8.603,23.383 8.565,23.399 8.527,23.417 8.49,23.437 8.454,23.459 8.42,23.483 8.387,23.508 8.355,23.535 8.324,23.564 8.295,23.595 8.268,23.627 8.243,23.66 8.219,23.694 8.197,23.73 8.177,23.767 8.159,23.805 8.143,23.843 8.129,23.883 8.117,23.923 8.107,23.964 8.1,24.005 8.094,24.046 8.091,24.088 8.09,24.13 8.091,24.172 8.094,24.214 8.1,24.255 8.107,24.296 8.117,24.337 8.129,24.377 8.143,24.417 8.159,24.455 8.177,24.493 8.197,24.53 8.219,24.566 8.243,24.6 8.268,24.633 8.295,24.665 8.324,24.696 8.355,24.725 8.387,24.752 8.42,24.777 8.454,24.801 8.49,24.823 8.527,24.843 8.565,24.861 8.603,24.877 8.643,24.891 8.683,24.903 8.724,24.913 8.765,24.92 8.806,24.926 8.848,24.929 8.89,24.93 11.29,24.93
  Top Layer region: 11.29,18.25 8.29,18.25 8.28,18.25 8.269,18.251 8.259,18.252 8.248,18.254 8.238,18.257 8.228,18.26 8.218,18.263 8.209,18.267 8.199,18.272 8.19,18.277 8.181,18.282 8.172,18.288 8.164,18.295 8.156,18.301 8.149,18.309 8.141,18.316 8.135,18.324 8.128,18.332 8.122,18.341 8.117,18.35 8.112,18.359 8.107,18.369 8.103,18.378 8.1,18.388 8.097,18.398 8.094,18.408 8.092,18.419 8.091,18.429 8.09,18.44 8.09,18.45 8.09,19.65 8.09,19.66 8.091,19.671 8.092,19.681 8.094,19.692 8.097,19.702 8.1,19.712 8.103,19.722 8.107,19.731 8.112,19.741 8.117,19.75 8.122,19.759 8.128,19.768 8.135,19.776 8.141,19.784 8.149,19.791 8.156,19.799 8.164,19.805 8.172,19.812 8.181,19.818 8.19,19.823 8.199,19.828 8.209,19.833 8.218,19.837 8.228,19.84 8.238,19.843 8.248,19.846 8.259,19.848 8.269,19.849 8.28,19.85 8.29,19.85 11.29,19.85
  Top Layer region: 11.29,20.79 8.89,20.79 8.848,20.791 8.806,20.794 8.765,20.8 8.724,20.807 8.683,20.817 8.643,20.829 8.603,20.843 8.565,20.859 8.527,20.877 8.49,20.897 8.454,20.919 8.42,20.943 8.387,20.968 8.355,20.995 8.324,21.024 8.295,21.055 8.268,21.087 8.243,21.12 8.219,21.154 8.197,21.19 8.177,21.227 8.159,21.265 8.143,21.303 8.129,21.343 8.117,21.383 8.107,21.424 8.1,21.465 8.094,21.506 8.091,21.548 8.09,21.59 8.091,21.632 8.094,21.674 8.1,21.715 8.107,21.756 8.117,21.797 8.129,21.837 8.143,21.877 8.159,21.915 8.177,21.953 8.197,21.99 8.219,22.026 8.243,22.06 8.268,22.093 8.295,22.125 8.324,22.156 8.355,22.185 8.387,22.212 8.42,22.237 8.454,22.261 8.49,22.283 8.527,22.303 8.565,22.321 8.603,22.337 8.643,22.351 8.683,22.363 8.724,22.373 8.765,22.38 8.806,22.386 8.848,22.389 8.89,22.39 11.29,22.39
  Top Layer region: 11.29,15.71 8.89,15.71 8.848,15.711 8.806,15.714 8.765,15.72 8.724,15.727 8.683,15.737 8.643,15.749 8.603,15.763 8.565,15.779 8.527,15.797 8.49,15.817 8.454,15.839 8.42,15.863 8.387,15.888 8.355,15.915 8.324,15.944 8.295,15.975 8.268,16.007 8.243,16.04 8.219,16.074 8.197,16.11 8.177,16.147 8.159,16.185 8.143,16.223 8.129,16.263 8.117,16.303 8.107,16.344 8.1,16.385 8.094,16.426 8.091,16.468 8.09,16.51 8.091,16.552 8.094,16.594 8.1,16.635 8.107,16.676 8.117,16.717 8.129,16.757 8.143,16.797 8.159,16.835 8.177,16.873 8.197,16.91 8.219,16.946 8.243,16.98 8.268,17.013 8.295,17.045 8.324,17.076 8.355,17.105 8.387,17.132 8.42,17.157 8.454,17.181 8.49,17.203 8.527,17.223 8.565,17.241 8.603,17.257 8.643,17.271 8.683,17.283 8.724,17.293 8.765,17.3 8.806,17.306 8.848,17.309 8.89,17.31 11.29,17.31
  Top Layer region: 11.29,13.17 8.89,13.17 8.848,13.171 8.806,13.174 8.765,13.18 8.724,13.187 8.683,13.197 8.643,13.209 8.603,13.223 8.565,13.239 8.527,13.257 8.49,13.277 8.454,13.299 8.42,13.323 8.387,13.348 8.355,13.375 8.324,13.404 8.295,13.435 8.268,13.467 8.243,13.5 8.219,13.534 8.197,13.57 8.177,13.607 8.159,13.645 8.143,13.683 8.129,13.723 8.117,13.763 8.107,13.804 8.1,13.845 8.094,13.886 8.091,13.928 8.09,13.97 8.091,14.012 8.094,14.054 8.1,14.095 8.107,14.136 8.117,14.177 8.129,14.217 8.143,14.257 8.159,14.295 8.177,14.333 8.197,14.37 8.219,14.406 8.243,14.44 8.268,14.473 8.295,14.505 8.324,14.536 8.355,14.565 8.387,14.592 8.42,14.617 8.454,14.641 8.49,14.663 8.527,14.683 8.565,14.701 8.603,14.717 8.643,14.731 8.683,14.743 8.724,14.753 8.765,14.76 8.806,14.766 8.848,14.769 8.89,14.77 11.29,14.77
  Top Layer region: 11.29,10.63 8.89,10.63 8.848,10.631 8.806,10.634 8.765,10.64 8.724,10.647 8.683,10.657 8.643,10.669 8.603,10.683 8.565,10.699 8.527,10.717 8.49,10.737 8.454,10.759 8.42,10.783 8.387,10.808 8.355,10.835 8.324,10.864 8.295,10.895 8.268,10.927 8.243,10.96 8.219,10.994 8.197,11.03 8.177,11.067 8.159,11.105 8.143,11.143 8.129,11.183 8.117,11.223 8.107,11.264 8.1,11.305 8.094,11.346 8.091,11.388 8.09,11.43 8.091,11.472 8.094,11.514 8.1,11.555 8.107,11.596 8.117,11.637 8.129,11.677 8.143,11.717 8.159,11.755 8.177,11.793 8.197,11.83 8.219,11.866 8.243,11.9 8.268,11.933 8.295,11.965 8.324,11.996 8.355,12.025 8.387,12.052 8.42,12.077 8.454,12.101 8.49,12.123 8.527,12.143 8.565,12.161 8.603,12.177 8.643,12.191 8.683,12.203 8.724,12.213 8.765,12.22 8.806,12.226 8.848,12.229 8.89,12.23 11.29,12.23
  Top Layer region: 11.29,8.09 8.89,8.09 8.848,8.091 8.806,8.094 8.765,8.1 8.724,8.107 8.683,8.117 8.643,8.129 8.603,8.143 8.565,8.159 8.527,8.177 8.49,8.197 8.454,8.219 8.42,8.243 8.387,8.268 8.355,8.295 8.324,8.324 8.295,8.355 8.268,8.387 8.243,8.42 8.219,8.454 8.197,8.49 8.177,8.527 8.159,8.565 8.143,8.603 8.129,8.643 8.117,8.683 8.107,8.724 8.1,8.765 8.094,8.806 8.091,8.848 8.09,8.89 8.091,8.932 8.094,8.974 8.1,9.015 8.107,9.056 8.117,9.097 8.129,9.137 8.143,9.177 8.159,9.215 8.177,9.253 8.197,9.29 8.219,9.326 8.243,9.36 8.268,9.393 8.295,9.425 8.324,9.456 8.355,9.485 8.387,9.512 8.42,9.537 8.454,9.561 8.49,9.583 8.527,9.603 8.565,9.621 8.603,9.637 8.643,9.651 8.683,9.663 8.724,9.673 8.765,9.68 8.806,9.686 8.848,9.689 8.89,9.69 11.29,9.69
  Top Layer region: 11.29,3.01 8.89,3.01 8.848,3.011 8.806,3.014 8.765,3.02 8.724,3.027 8.683,3.037 8.643,3.049 8.603,3.063 8.565,3.079 8.527,3.097 8.49,3.117 8.454,3.139 8.42,3.163 8.387,3.188 8.355,3.215 8.324,3.244 8.295,3.275 8.268,3.307 8.243,3.34 8.219,3.374 8.197,3.41 8.177,3.447 8.159,3.485 8.143,3.523 8.129,3.563 8.117,3.603 8.107,3.644 8.1,3.685 8.094,3.726 8.091,3.768 8.09,3.81 8.091,3.852 8.094,3.894 8.1,3.935 8.107,3.976 8.117,4.017 8.129,4.057 8.143,4.097 8.159,4.135 8.177,4.173 8.197,4.21 8.219,4.246 8.243,4.28 8.268,4.313 8.295,4.345 8.324,4.376 8.355,4.405 8.387,4.432 8.42,4.457 8.454,4.481 8.49,4.503 8.527,4.523 8.565,4.541 8.603,4.557 8.643,4.571 8.683,4.583 8.724,4.593 8.765,4.6 8.806,4.606 8.848,4.609 8.89,4.61 11.29,4.61
  Top Layer region: 11.29,0.47 8.89,0.47 8.848,0.471 8.806,0.474 8.765,0.48 8.724,0.487 8.683,0.497 8.643,0.509 8.603,0.523 8.565,0.539 8.527,0.557 8.49,0.577 8.454,0.599 8.42,0.623 8.387,0.648 8.355,0.675 8.324,0.704 8.295,0.735 8.268,0.767 8.243,0.8 8.219,0.834 8.197,0.87 8.177,0.907 8.159,0.945 8.143,0.983 8.129,1.023 8.117,1.063 8.107,1.104 8.1,1.145 8.094,1.186 8.091,1.228 8.09,1.27 8.091,1.312 8.094,1.354 8.1,1.395 8.107,1.436 8.117,1.477 8.129,1.517 8.143,1.557 8.159,1.595 8.177,1.633 8.197,1.67 8.219,1.706 8.243,1.74 8.268,1.773 8.295,1.805 8.324,1.836 8.355,1.865 8.387,1.892 8.42,1.917 8.454,1.941 8.49,1.963 8.527,1.983 8.565,2.001 8.603,2.017 8.643,2.031 8.683,2.043 8.724,2.053 8.765,2.06 8.806,2.066 8.848,2.069 8.89,2.07 11.29,2.07
  Top Layer region: 11.29,-2.07 8.89,-2.07 8.848,-2.069 8.806,-2.066 8.765,-2.06 8.724,-2.053 8.683,-2.043 8.643,-2.031 8.603,-2.017 8.565,-2.001 8.527,-1.983 8.49,-1.963 8.454,-1.941 8.42,-1.917 8.387,-1.892 8.355,-1.865 8.324,-1.836 8.295,-1.805 8.268,-1.773 8.243,-1.74 8.219,-1.706 8.197,-1.67 8.177,-1.633 8.159,-1.595 8.143,-1.557 8.129,-1.517 8.117,-1.477 8.107,-1.436 8.1,-1.395 8.094,-1.354 8.091,-1.312 8.09,-1.27 8.091,-1.228 8.094,-1.186 8.1,-1.145 8.107,-1.104 8.117,-1.063 8.129,-1.023 8.143,-0.983 8.159,-0.945 8.177,-0.907 8.197,-0.87 8.219,-0.834 8.243,-0.8 8.268,-0.767 8.295,-0.735 8.324,-0.704 8.355,-0.675 8.387,-0.648 8.42,-0.623 8.454,-0.599 8.49,-0.577 8.527,-0.557 8.565,-0.539 8.603,-0.523 8.643,-0.509 8.683,-0.497 8.724,-0.487 8.765,-0.48 8.806,-0.474 8.848,-0.471 8.89,-0.47 11.29,-0.47
  Top Layer region: 11.29,-4.61 8.89,-4.61 8.848,-4.609 8.806,-4.606 8.765,-4.6 8.724,-4.593 8.683,-4.583 8.643,-4.571 8.603,-4.557 8.565,-4.541 8.527,-4.523 8.49,-4.503 8.454,-4.481 8.42,-4.457 8.387,-4.432 8.355,-4.405 8.324,-4.376 8.295,-4.345 8.268,-4.313 8.243,-4.28 8.219,-4.246 8.197,-4.21 8.177,-4.173 8.159,-4.135 8.143,-4.097 8.129,-4.057 8.117,-4.017 8.107,-3.976 8.1,-3.935 8.094,-3.894 8.091,-3.852 8.09,-3.81 8.091,-3.768 8.094,-3.726 8.1,-3.685 8.107,-3.644 8.117,-3.603 8.129,-3.563 8.143,-3.523 8.159,-3.485 8.177,-3.447 8.197,-3.41 8.219,-3.374 8.243,-3.34 8.268,-3.307 8.295,-3.275 8.324,-3.244 8.355,-3.215 8.387,-3.188 8.42,-3.163 8.454,-3.139 8.49,-3.117 8.527,-3.097 8.565,-3.079 8.603,-3.063 8.643,-3.049 8.683,-3.037 8.724,-3.027 8.765,-3.02 8.806,-3.014 8.848,-3.011 8.89,-3.01 11.29,-3.01
  Top Layer region: 11.29,-9.69 8.89,-9.69 8.848,-9.689 8.806,-9.686 8.765,-9.68 8.724,-9.673 8.683,-9.663 8.643,-9.651 8.603,-9.637 8.565,-9.621 8.527,-9.603 8.49,-9.583 8.454,-9.561 8.42,-9.537 8.387,-9.512 8.355,-9.485 8.324,-9.456 8.295,-9.425 8.268,-9.393 8.243,-9.36 8.219,-9.326 8.197,-9.29 8.177,-9.253 8.159,-9.215 8.143,-9.177 8.129,-9.137 8.117,-9.097 8.107,-9.056 8.1,-9.015 8.094,-8.974 8.091,-8.932 8.09,-8.89 8.091,-8.848 8.094,-8.806 8.1,-8.765 8.107,-8.724 8.117,-8.683 8.129,-8.643 8.143,-8.603 8.159,-8.565 8.177,-8.527 8.197,-8.49 8.219,-8.454 8.243,-8.42 8.268,-8.387 8.295,-8.355 8.324,-8.324 8.355,-8.295 8.387,-8.268 8.42,-8.243 8.454,-8.219 8.49,-8.197 8.527,-8.177 8.565,-8.159 8.603,-8.143 8.643,-8.129 8.683,-8.117 8.724,-8.107 8.765,-8.1 8.806,-8.094 8.848,-8.091 8.89,-8.09 11.29,-8.09
  Top Layer region: 11.29,-12.23 8.89,-12.23 8.848,-12.229 8.806,-12.226 8.765,-12.22 8.724,-12.213 8.683,-12.203 8.643,-12.191 8.603,-12.177 8.565,-12.161 8.527,-12.143 8.49,-12.123 8.454,-12.101 8.42,-12.077 8.387,-12.052 8.355,-12.025 8.324,-11.996 8.295,-11.965 8.268,-11.933 8.243,-11.9 8.219,-11.866 8.197,-11.83 8.177,-11.793 8.159,-11.755 8.143,-11.717 8.129,-11.677 8.117,-11.637 8.107,-11.596 8.1,-11.555 8.094,-11.514 8.091,-11.472 8.09,-11.43 8.091,-11.388 8.094,-11.346 8.1,-11.305 8.107,-11.264 8.117,-11.223 8.129,-11.183 8.143,-11.143 8.159,-11.105 8.177,-11.067 8.197,-11.03 8.219,-10.994 8.243,-10.96 8.268,-10.927 8.295,-10.895 8.324,-10.864 8.355,-10.835 8.387,-10.808 8.42,-10.783 8.454,-10.759 8.49,-10.737 8.527,-10.717 8.565,-10.699 8.603,-10.683 8.643,-10.669 8.683,-10.657 8.724,-10.647 8.765,-10.64 8.806,-10.634 8.848,-10.631 8.89,-10.63 11.29,-10.63
  Top Layer region: 11.29,-14.77 8.89,-14.77 8.848,-14.769 8.806,-14.766 8.765,-14.76 8.724,-14.753 8.683,-14.743 8.643,-14.731 8.603,-14.717 8.565,-14.701 8.527,-14.683 8.49,-14.663 8.454,-14.641 8.42,-14.617 8.387,-14.592 8.355,-14.565 8.324,-14.536 8.295,-14.505 8.268,-14.473 8.243,-14.44 8.219,-14.406 8.197,-14.37 8.177,-14.333 8.159,-14.295 8.143,-14.257 8.129,-14.217 8.117,-14.177 8.107,-14.136 8.1,-14.095 8.094,-14.054 8.091,-14.012 8.09,-13.97 8.091,-13.928 8.094,-13.886 8.1,-13.845 8.107,-13.804 8.117,-13.763 8.129,-13.723 8.143,-13.683 8.159,-13.645 8.177,-13.607 8.197,-13.57 8.219,-13.534 8.243,-13.5 8.268,-13.467 8.295,-13.435 8.324,-13.404 8.355,-13.375 8.387,-13.348 8.42,-13.323 8.454,-13.299 8.49,-13.277 8.527,-13.257 8.565,-13.239 8.603,-13.223 8.643,-13.209 8.683,-13.197 8.724,-13.187 8.765,-13.18 8.806,-13.174 8.848,-13.171 8.89,-13.17 11.29,-13.17
  Top Layer region: 11.29,-17.31 8.89,-17.31 8.848,-17.309 8.806,-17.306 8.765,-17.3 8.724,-17.293 8.683,-17.283 8.643,-17.271 8.603,-17.257 8.565,-17.241 8.527,-17.223 8.49,-17.203 8.454,-17.181 8.42,-17.157 8.387,-17.132 8.355,-17.105 8.324,-17.076 8.295,-17.045 8.268,-17.013 8.243,-16.98 8.219,-16.946 8.197,-16.91 8.177,-16.873 8.159,-16.835 8.143,-16.797 8.129,-16.757 8.117,-16.717 8.107,-16.676 8.1,-16.635 8.094,-16.594 8.091,-16.552 8.09,-16.51 8.091,-16.468 8.094,-16.426 8.1,-16.385 8.107,-16.344 8.117,-16.303 8.129,-16.263 8.143,-16.223 8.159,-16.185 8.177,-16.147 8.197,-16.11 8.219,-16.074 8.243,-16.04 8.268,-16.007 8.295,-15.975 8.324,-15.944 8.355,-15.915 8.387,-15.888 8.42,-15.863 8.454,-15.839 8.49,-15.817 8.527,-15.797 8.565,-15.779 8.603,-15.763 8.643,-15.749 8.683,-15.737 8.724,-15.727 8.765,-15.72 8.806,-15.714 8.848,-15.711 8.89,-15.71 11.29,-15.71
  Top Layer region: 11.29,-22.39 8.89,-22.39 8.848,-22.389 8.806,-22.386 8.765,-22.38 8.724,-22.373 8.683,-22.363 8.643,-22.351 8.603,-22.337 8.565,-22.321 8.527,-22.303 8.49,-22.283 8.454,-22.261 8.42,-22.237 8.387,-22.212 8.355,-22.185 8.324,-22.156 8.295,-22.125 8.268,-22.093 8.243,-22.06 8.219,-22.026 8.197,-21.99 8.177,-21.953 8.159,-21.915 8.143,-21.877 8.129,-21.837 8.117,-21.797 8.107,-21.756 8.1,-21.715 8.094,-21.674 8.091,-21.632 8.09,-21.59 8.091,-21.548 8.094,-21.506 8.1,-21.465 8.107,-21.424 8.117,-21.383 8.129,-21.343 8.143,-21.303 8.159,-21.265 8.177,-21.227 8.197,-21.19 8.219,-21.154 8.243,-21.12 8.268,-21.087 8.295,-21.055 8.324,-21.024 8.355,-20.995 8.387,-20.968 8.42,-20.943 8.454,-20.919 8.49,-20.897 8.527,-20.877 8.565,-20.859 8.603,-20.843 8.643,-20.829 8.683,-20.817 8.724,-20.807 8.765,-20.8 8.806,-20.794 8.848,-20.791 8.89,-20.79 11.29,-20.79
  Top Layer region: 11.29,-24.93 8.89,-24.93 8.848,-24.929 8.806,-24.926 8.765,-24.92 8.724,-24.913 8.683,-24.903 8.643,-24.891 8.603,-24.877 8.565,-24.861 8.527,-24.843 8.49,-24.823 8.454,-24.801 8.42,-24.777 8.387,-24.752 8.355,-24.725 8.324,-24.696 8.295,-24.665 8.268,-24.633 8.243,-24.6 8.219,-24.566 8.197,-24.53 8.177,-24.493 8.159,-24.455 8.143,-24.417 8.129,-24.377 8.117,-24.337 8.107,-24.296 8.1,-24.255 8.094,-24.214 8.091,-24.172 8.09,-24.13 8.091,-24.088 8.094,-24.046 8.1,-24.005 8.107,-23.964 8.117,-23.923 8.129,-23.883 8.143,-23.843 8.159,-23.805 8.177,-23.767 8.197,-23.73 8.219,-23.694 8.243,-23.66 8.268,-23.627 8.295,-23.595 8.324,-23.564 8.355,-23.535 8.387,-23.508 8.42,-23.483 8.454,-23.459 8.49,-23.437 8.527,-23.417 8.565,-23.399 8.603,-23.383 8.643,-23.369 8.683,-23.357 8.724,-23.347 8.765,-23.34 8.806,-23.334 8.848,-23.331 8.89,-23.33 11.29,-23.33
  Top Layer region: 11.29,5.55 8.29,5.55 8.28,5.55 8.269,5.551 8.259,5.552 8.248,5.554 8.238,5.557 8.228,5.56 8.218,5.563 8.209,5.567 8.199,5.572 8.19,5.577 8.181,5.582 8.172,5.588 8.164,5.595 8.156,5.601 8.149,5.609 8.141,5.616 8.135,5.624 8.128,5.632 8.122,5.641 8.117,5.65 8.112,5.659 8.107,5.669 8.103,5.678 8.1,5.688 8.097,5.698 8.094,5.708 8.092,5.719 8.091,5.729 8.09,5.74 8.09,5.75 8.09,6.95 8.09,6.96 8.091,6.971 8.092,6.981 8.094,6.992 8.097,7.002 8.1,7.012 8.103,7.022 8.107,7.031 8.112,7.041 8.117,7.05 8.122,7.059 8.128,7.068 8.135,7.076 8.141,7.084 8.149,7.091 8.156,7.099 8.164,7.105 8.172,7.112 8.181,7.118 8.19,7.123 8.199,7.128 8.209,7.133 8.218,7.137 8.228,7.14 8.238,7.143 8.248,7.146 8.259,7.148 8.269,7.149 8.28,7.15 8.29,7.15 11.29,7.15
  Top Layer region: 11.29,-7.15 8.29,-7.15 8.28,-7.15 8.269,-7.149 8.259,-7.148 8.248,-7.146 8.238,-7.143 8.228,-7.14 8.218,-7.137 8.209,-7.133 8.199,-7.128 8.19,-7.123 8.181,-7.118 8.172,-7.112 8.164,-7.105 8.156,-7.099 8.149,-7.091 8.141,-7.084 8.135,-7.076 8.128,-7.068 8.122,-7.059 8.117,-7.05 8.112,-7.041 8.107,-7.031 8.103,-7.022 8.1,-7.012 8.097,-7.002 8.094,-6.992 8.092,-6.981 8.091,-6.971 8.09,-6.96 8.09,-6.95 8.09,-5.75 8.09,-5.74 8.091,-5.729 8.092,-5.719 8.094,-5.708 8.097,-5.698 8.1,-5.688 8.103,-5.678 8.107,-5.669 8.112,-5.659 8.117,-5.65 8.122,-5.641 8.128,-5.632 8.135,-5.624 8.141,-5.616 8.149,-5.609 8.156,-5.601 8.164,-5.595 8.172,-5.588 8.181,-5.582 8.19,-5.577 8.199,-5.572 8.209,-5.567 8.218,-5.563 8.228,-5.56 8.238,-5.557 8.248,-5.554 8.259,-5.552 8.269,-5.551 8.28,-5.55 8.29,-5.55 11.29,-5.55
  Top Layer region: 11.29,-19.85 8.29,-19.85 8.28,-19.85 8.269,-19.849 8.259,-19.848 8.248,-19.846 8.238,-19.843 8.228,-19.84 8.218,-19.837 8.209,-19.833 8.199,-19.828 8.19,-19.823 8.181,-19.818 8.172,-19.812 8.164,-19.805 8.156,-19.799 8.149,-19.791 8.141,-19.784 8.135,-19.776 8.128,-19.768 8.122,-19.759 8.117,-19.75 8.112,-19.741 8.107,-19.731 8.103,-19.722 8.1,-19.712 8.097,-19.702 8.094,-19.692 8.092,-19.681 8.091,-19.671 8.09,-19.66 8.09,-19.65 8.09,-18.45 8.09,-18.44 8.091,-18.429 8.092,-18.419 8.094,-18.408 8.097,-18.398 8.1,-18.388 8.103,-18.378 8.107,-18.369 8.112,-18.359 8.117,-18.35 8.122,-18.341 8.128,-18.332 8.135,-18.324 8.141,-18.316 8.149,-18.309 8.156,-18.301 8.164,-18.295 8.172,-18.288 8.181,-18.282 8.19,-18.277 8.199,-18.272 8.209,-18.267 8.218,-18.263 8.228,-18.26 8.238,-18.257 8.248,-18.254 8.259,-18.252 8.269,-18.251 8.28,-18.25 8.29,-18.25 11.29,-18.25
  Top Layer region: -2.498,-23.101 -2.456,-23.104 -2.415,-23.11 -2.374,-23.117 -2.333,-23.127 -2.293,-23.139 -2.253,-23.153 -2.215,-23.169 -2.177,-23.187 -2.14,-23.207 -2.104,-23.229 -2.07,-23.253 -2.037,-23.278 -2.005,-23.305 -1.974,-23.334 -1.945,-23.365 -1.918,-23.397 -1.893,-23.43 -1.869,-23.464 -1.847,-23.5 -1.827,-23.537 -1.809,-23.575 -1.793,-23.613 -1.779,-23.653 -1.767,-23.693 -1.757,-23.734 -1.75,-23.775 -1.744,-23.816 -1.741,-23.858 -1.74,-23.9 -1.74,-26.3 -3.34,-26.3 -3.34,-23.9 -3.339,-23.858 -3.336,-23.816 -3.33,-23.775 -3.323,-23.734 -3.313,-23.693 -3.301,-23.653 -3.287,-23.613 -3.271,-23.575 -3.253,-23.537 -3.233,-23.5 -3.211,-23.464 -3.187,-23.43 -3.162,-23.397 -3.135,-23.365 -3.106,-23.334 -3.075,-23.305 -3.043,-23.278 -3.01,-23.253 -2.976,-23.229 -2.94,-23.207 -2.903,-23.187 -2.865,-23.169 -2.827,-23.153 -2.787,-23.139 -2.747,-23.127 -2.706,-23.117 -2.665,-23.11 -2.624,-23.104 -2.582,-23.101 -2.54,-23.1
  Top Layer region: 0.61,-23.1 0.621,-23.101 0.631,-23.102 0.642,-23.104 0.652,-23.107 0.662,-23.11 0.672,-23.113 0.681,-23.117 0.691,-23.122 0.7,-23.127 0.709,-23.132 0.718,-23.138 0.726,-23.145 0.734,-23.151 0.741,-23.159 0.749,-23.166 0.755,-23.174 0.762,-23.182 0.768,-23.191 0.773,-23.2 0.778,-23.209 0.783,-23.219 0.787,-23.228 0.79,-23.238 0.793,-23.248 0.796,-23.258 0.798,-23.269 0.799,-23.279 0.8,-23.29 0.8,-23.3 0.8,-26.3 -0.8,-26.3 -0.8,-23.3 -0.8,-23.29 -0.799,-23.279 -0.798,-23.269 -0.796,-23.258 -0.793,-23.248 -0.79,-23.238 -0.787,-23.228 -0.783,-23.219 -0.778,-23.209 -0.773,-23.2 -0.768,-23.191 -0.762,-23.182 -0.755,-23.174 -0.749,-23.166 -0.741,-23.159 -0.734,-23.151 -0.726,-23.145 -0.718,-23.138 -0.709,-23.132 -0.7,-23.127 -0.691,-23.122 -0.681,-23.117 -0.672,-23.113 -0.662,-23.11 -0.652,-23.107 -0.642,-23.104 -0.631,-23.102 -0.621,-23.101 -0.61,-23.1 -0.6,-23.1 0.6,-23.1
  Top Layer region: 2.582,-23.101 2.624,-23.104 2.665,-23.11 2.706,-23.117 2.747,-23.127 2.787,-23.139 2.827,-23.153 2.865,-23.169 2.903,-23.187 2.94,-23.207 2.976,-23.229 3.01,-23.253 3.043,-23.278 3.075,-23.305 3.106,-23.334 3.135,-23.365 3.162,-23.397 3.187,-23.43 3.211,-23.464 3.233,-23.5 3.253,-23.537 3.271,-23.575 3.287,-23.613 3.301,-23.653 3.313,-23.693 3.323,-23.734 3.33,-23.775 3.336,-23.816 3.339,-23.858 3.34,-23.9 3.34,-26.3 1.74,-26.3 1.74,-23.9 1.741,-23.858 1.744,-23.816 1.75,-23.775 1.757,-23.734 1.767,-23.693 1.779,-23.653 1.793,-23.613 1.809,-23.575 1.827,-23.537 1.847,-23.5 1.869,-23.464 1.893,-23.43 1.918,-23.397 1.945,-23.365 1.974,-23.334 2.005,-23.305 2.037,-23.278 2.07,-23.253 2.104,-23.229 2.14,-23.207 2.177,-23.187 2.215,-23.169 2.253,-23.153 2.293,-23.139 2.333,-23.127 2.374,-23.117 2.415,-23.11 2.456,-23.104 2.498,-23.101 2.54,-23.1
  silkscreen extent -12.29,-25.5 10.5,26.8, body extent -10.5,-25.4 10.5,26.9, height 3.74
MOUNT_M3_TIGHT [mil]
  round 14 hole 12: 1(-82.21,0) 1(-58.13,-58.13) 1(-58.13,58.13) 1(0,-82.21) 1(0,82.21) 1(0,82.21) 1(58.13,-58.13) 1(58.13,58.13) 1(82.21,0)
  round 208.66 hole 122.05: 1(0,0)
RESC1608X55N [mm] "Chip Resistor, Body 1.6x0.8mm, EIA 0603, IPC Medium Density"
  round 0.254 on Mech15: 0(0,0)
  rrect25% 0.9x1 smd: 1(-0.85,0) 2(0.85,0)
  Top Layer pour cut-out: -0.6,0.5 0.6,0.5 0.6,-0.5 -0.6,-0.5
  silkscreen extent -1.5,-0.7 1.5,0.7, body extent -0.87,-0.47 0.88,0.48, height 0.54
RESC2012X70N [mm] "Chip Resistor, Body 2.0x1.2mm, EIA 0805, IPC Medium Density"
  round 0.254 on Mech15: 0(0,0)
  rrect25% 0.8x1.3 smd: 1(-1,0) 2(1,0)
  Top Layer pour cut-out: -0.725,0.65 -0.525,0.85 0.525,0.85 0.725,0.65 0.725,-0.65 0.525,-0.85 -0.525,-0.85 -0.725,-0.65
  silkscreen extent -1.6,-0.85 1.6,0.85, body extent -1.1,-0.67 1.1,0.68, height 0.69
RESC5025X06N [mm] "Chip Resistor, 2-Leads, Body 5.00x2.50mm, IPC Medium Density"
  rect 1.3x2.65 smd: 1(-2.275,0) 2(2.275,0)
  silkscreen extent -3.25,-1.75 3.25,1.75, body extent -2.58,-1.33 2.58,1.33, height 0.6
RESC6432X06N [mm] "Chip Resistor, 2-Leads, Body 6.35x3.20mm, IPC Medium Density"
  rrect25% 2.05x3.35 smd: 1(-2.55,0) 2(2.55,0)
  silkscreen extent -3.85,-1.95 3.85,1.95, body extent -3.22,-1.68 3.22,1.68, height 0.6
SOD323 [mm] "SODFL, 2-Leads, Body 1.25x2.50mm, IPC Medium Density"
  rect 0.85x0.45 smd: A(-1.125,0) K(1.125,0)
  silkscreen extent -1.5,-0.7 0.9,0.7, body extent -1.25,-0.67 1.25,0.67, height 1.1
SOP254P952X470-6N [mm]
  rect 2.54x1.27 smd: 1(-4.425,2.54) 2(-4.425,0) 3(-4.425,-2.54) 4(4.425,-2.54) 5(4.425,0) 6(4.425,2.54)
  silkscreen extent -5.38,-4.19 3.13,4.19, body extent -4.76,-4.19 4.76,4.19, height 4.7
SOT95P245X110-3M [mm] "SOT23, 3-Leads, Body 2.90x2.45mm, Pitch 0.95mm, IPC Low Density"
  rect 1.2x0.65 smd: 1(-1.3,0.95) 2(-1.3,-0.95) 3(1.3,0)
  silkscreen extent -1.42,-1.5 0.7,1.95, body extent -1.3,-1.5 1.3,1.5, height 1.1